# Altium PCB PCB_V3.PcbDoc
Units mil, origin at the board's own origin, x right, y up, seen from the top; angles counter-clockwise.
Board outline 1988.19 x 1771.65 mil, 2 copper layers (Top Layer, Bottom Layer); 47 components, 35 nets, 207 pads, 21 vias.
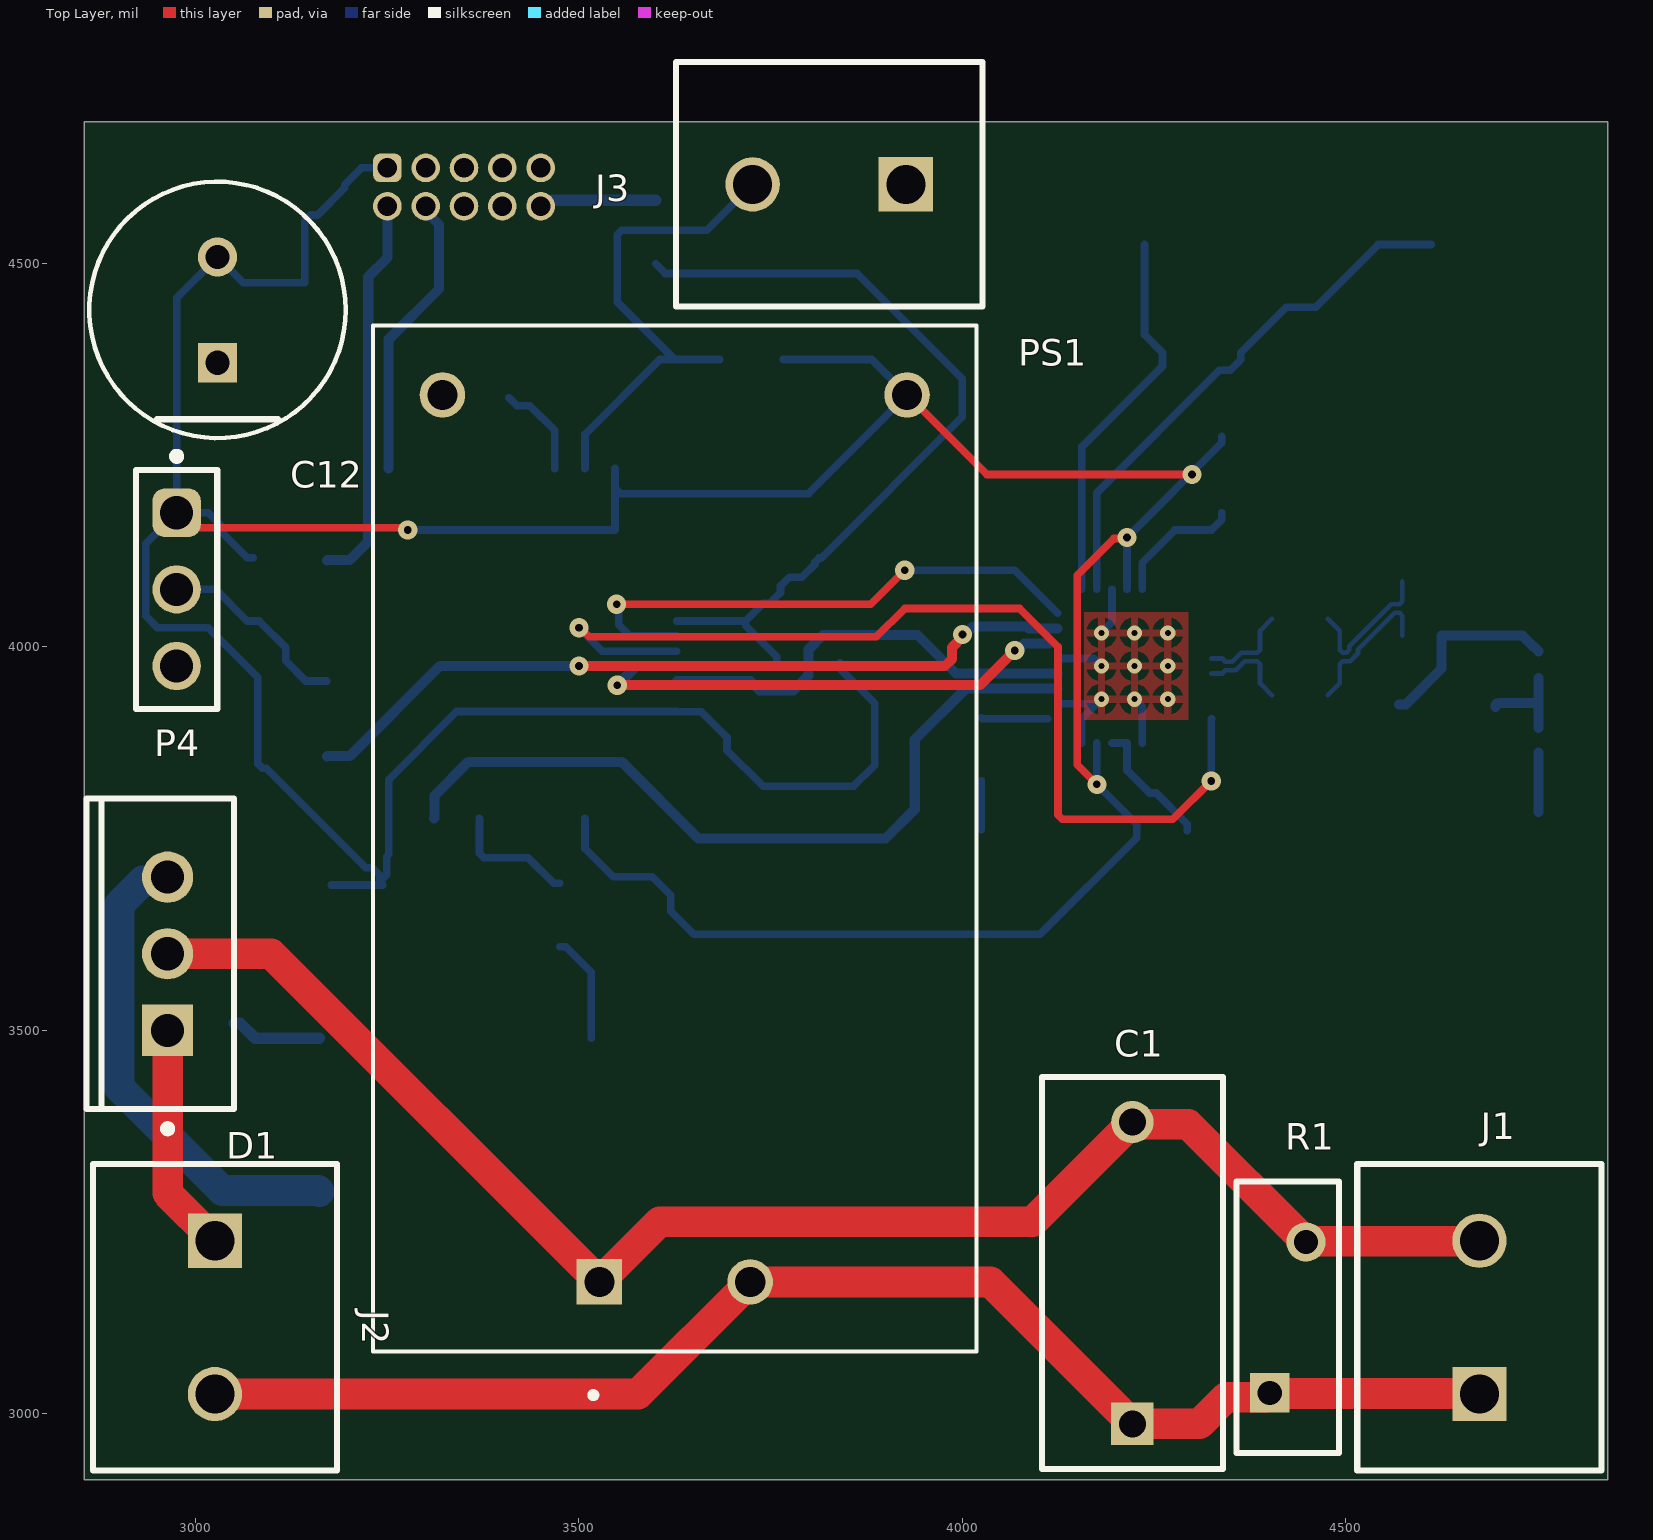
[diagram p0: Top Layer view]
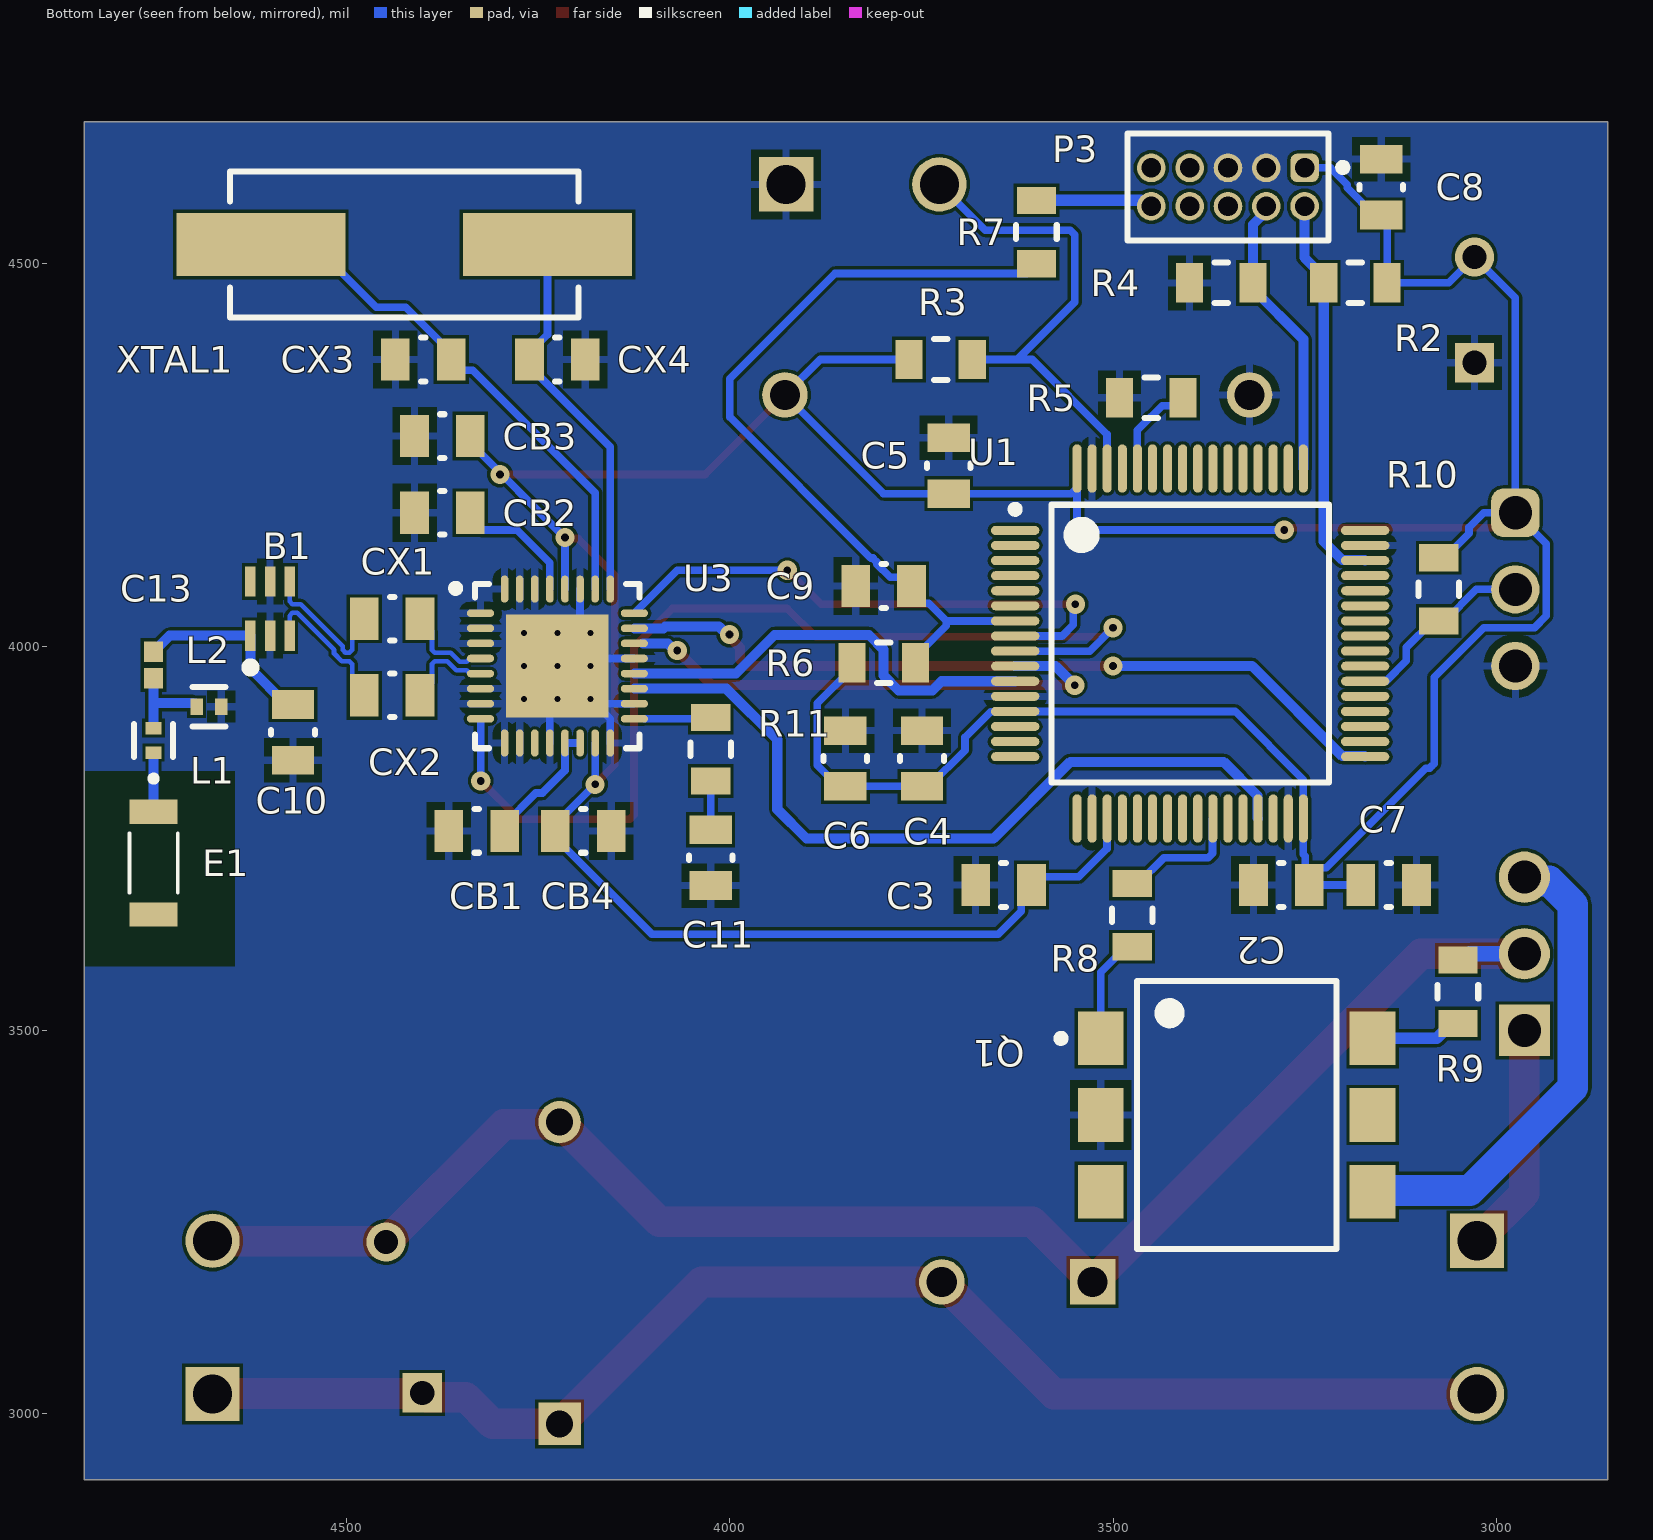
[diagram p1: Bottom Layer view, seen from below]
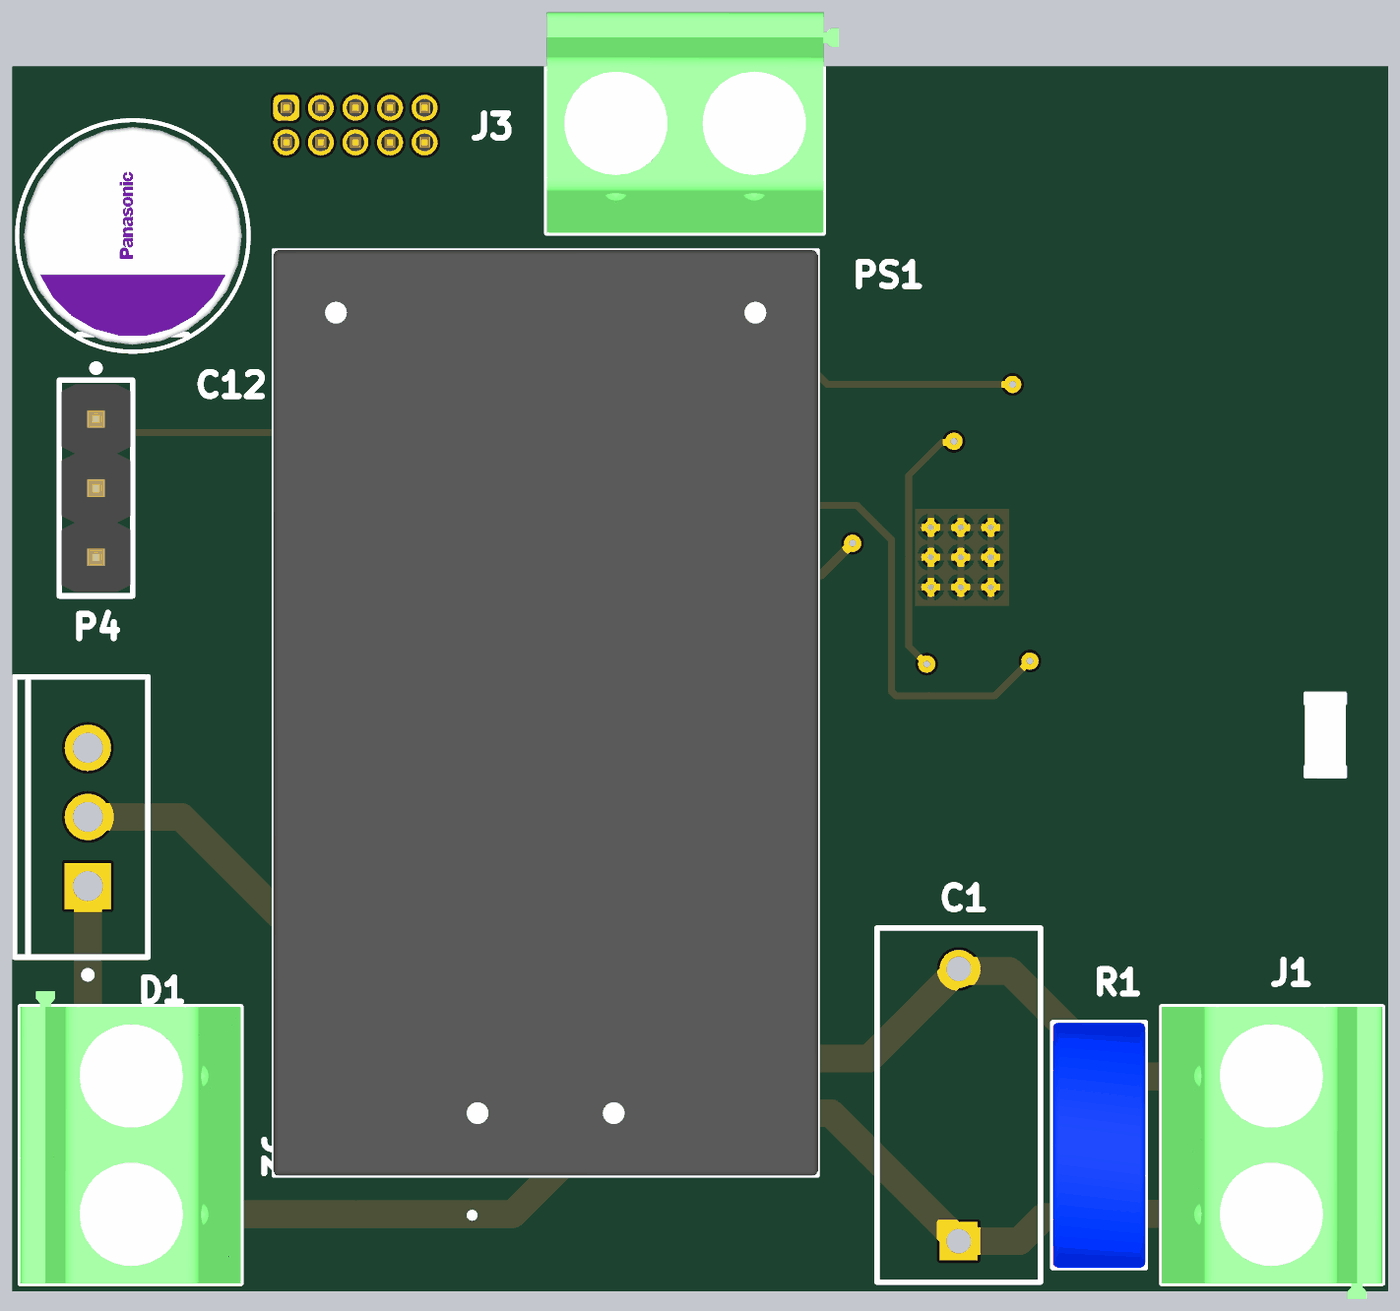
[diagram p2: 3D render of the assembled board from above, using the file's embedded part models]
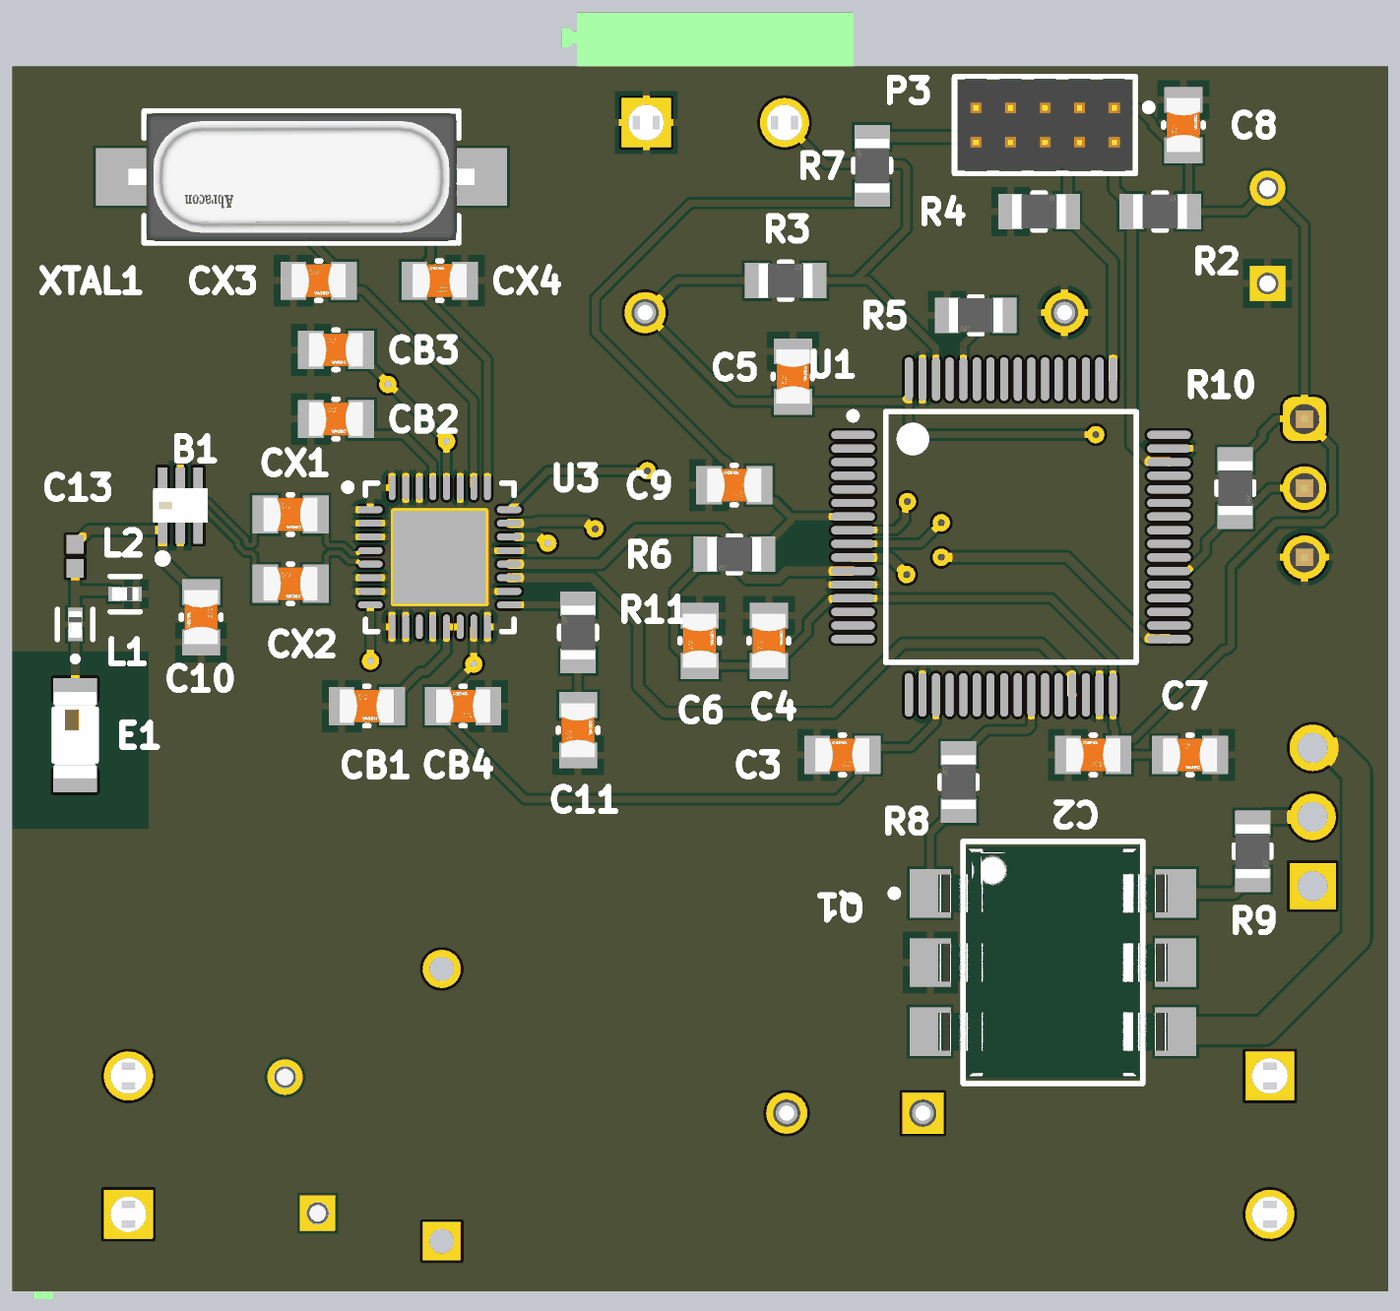
[diagram p3: 3D render of the assembled board from below, using the file's embedded part models]

## Layer stack, top to bottom
Top Solder: solder mask 0.4, Solder Resist, Dk 3.5
Top Layer: signal copper 1.4
Dielectric 1: dielectric 12.6, FR-4, Dk 4.6
Bottom Layer: signal copper 1.4
Bottom Solder: solder mask 0.4, Solder Resist, Dk 3.5

## Board outline
2854.33,2913.39 2854.33,4685.04 4842.52,4685.04 4842.52,2913.39

## Design rules (kind name [scope] priority, off if disabled: settings)
AssemblyTestPointUsage [All] p1: isadvanced=TRUE
AssemblyTestpoint [All] p1: isadvanced=TRUE testpointundercomponent=TRUE minsize=40 maxsize=100 preferedsize=60 minholesize=0 maxholesize=40 preferedholesize=32 testpointgrid=1 usegrid=TRUE gridtolerance=0.01 allowsidetop=TRUE allowsidebottom=TRUE
Clearance Clearance_1 [OnMid vs OnMid] p1: gap=4 ignorepadtopadclearanceinfootprint=FALSE except(5: Arc-Via Track-Via SMDPad-Via THPad-Via Via-Via Via-Text; 10: Arc-Hole Track-Hole SMDPad-Hole THPad-Hole Via-Hole Fill-Fill Fill-Poly Fill-Region Fill-Hole Poly-Poly Poly-Region Poly-Hole Region-Region Region-Hole Text-Hole Hole-Hole) sourcerule=53 cellrowname=All cellrowtype=0 cellcolname=All cellcoltype=0 innerlayers=TRUE
Clearance Clearance_2 [(ExistsOnLayer('Top Layer') Or ExistsOnLayer('Bottom Layer')) vs (ExistsOnLayer('Top Layer') Or ExistsOnLayer('Bottom Layer'))] p2: gap=4 ignorepadtopadclearanceinfootprint=FALSE except(5: Arc-Via Track-Via SMDPad-Via THPad-Via Via-Via Via-Text; 10: Arc-Hole Track-Hole SMDPad-Hole THPad-Hole Via-Hole Fill-Fill Fill-Poly Fill-Region Fill-Hole Poly-Poly Poly-Region Poly-Hole Region-Region Region-Hole Text-Hole Hole-Hole) sourcerule=53 cellrowname=All cellrowtype=0 cellcolname=All cellcoltype=0 outerlayers=TRUE
Clearance [All] p3: gap=10 ignorepadtopadclearanceinfootprint=FALSE ismatrix=TRUE
ComponentClearance [All] p1: isadvanced=TRUE gap=10 collisioncheckmode=3 verticalgap=10 showdistances=FALSE
DiffPairsRouting DifferentialPairsRouting_1 [InDifferentialPairClass('All Differential Pairs')] p1: maxlimit=10 minlimit=5 mostfreqgap=10 toplayer_mingap=10 toplayer_minwidth=10.76 toplayer_maxwidth=10.76 toplayer_prefwidth=10.76 bottomlayer_maxgap=5 bottomlayer_prefgap=5 bottomlayer_minwidth=6.22 bottomlayer_maxwidth=6.22 bottomlayer_prefwidth=6.22 impedanceprofiledriven=TRUE impedanceprofileid={E41AB3C2-B8D7-460C-83DE-D0F2BE12A075} impedanceprofilevalue=100.000000 maxuncoupledlength=500
DiffPairsRouting [All] p2: maxlimit=10 minlimit=10 mostfreqgap=10 toplayer_minwidth=15 toplayer_maxwidth=15 toplayer_prefwidth=15 bottomlayer_minwidth=15 bottomlayer_maxwidth=15 bottomlayer_prefwidth=15 maxuncoupledlength=500
FabricationTestPointUsage [All] p1: isadvanced=TRUE valid=0 allowmultiple=FALSE
FabricationTestpoint [All] p1: isadvanced=TRUE side=3 testpointundercomponent=TRUE minsize=40 maxsize=100 preferedsize=60 minholesize=0 maxholesize=40 preferedholesize=32 testpointgrid=1 allowsidetop=TRUE allowsidebottom=TRUE usegrid=TRUE gridtolerance=0.01
FanoutControl Fanout_BGA [IsBGA] p1: isadvanced=TRUE bgadir=Out bgaviamode=Centered fanoutstyle=Auto fanoutdirection=Alternating viagrid=1 // Fanout_BGA (Default Rule)
FanoutControl Fanout_LCC [IsLCC] p2: isadvanced=TRUE bgadir=Out bgaviamode=Centered fanoutstyle=Auto fanoutdirection=Alternating viagrid=1 // Fanout_LCC (Default Rule)
FanoutControl Fanout_SOIC [IsSOIC] p3: isadvanced=TRUE bgadir=Out bgaviamode=Centered fanoutstyle=Auto fanoutdirection=Alternating viagrid=1 // Fanout_SOIC (Default Rule)
FanoutControl Fanout_Small [(CompPinCount < 5)] p4: isadvanced=TRUE bgadir=Out bgaviamode=Centered fanoutstyle=Auto fanoutdirection=OutThenIn viagrid=1 // Fanout_Small (Default Rule)
FanoutControl Fanout_Default [All] p5: isadvanced=TRUE bgadir=Out bgaviamode=Centered fanoutstyle=Auto fanoutdirection=Alternating viagrid=1 // Fanout_Default (Default Rule)
Height [All] p1: isadvanced=TRUE minheight=0 maxheight=1000 prefheight=500
HoleSize [All] p1: isadvanced=TRUE absolutevalues=TRUE maxlimit=100 minlimit=1 maxpercent=80.000 minpercent=20.000
HoleToHoleClearance [All] p1: isadvanced=TRUE gap=10 allowstackedmicrovias=TRUE
LayerPairs [All] p1: isadvanced=TRUE enforce=TRUE
MinimumSolderMaskSliver [All] p1: isadvanced=TRUE minsoldermaskwidth=10
NetAntennae [All] p1: isadvanced=TRUE netantennaetolerance=0
PasteMaskExpansion [All] p1: isadvanced=TRUE expansion=0
PlaneClearance [All] p1: isadvanced=TRUE clearance=20
PlaneConnect [All] p1: isadvanced=TRUE planeconnectstyle=Relief reliefexpansion=20 reliefentries=4 reliefconductorwidth=10 reliefairgap=10
PolygonConnect [All] p1: connectstyle=Relief reliefconductorwidth=10 reliefentries=4 polygonreliefangle="90 Angle" airgapwidth=10
RoutingCorners [All] p1: isadvanced=TRUE cornerstyle=45-Degree minsetback=100 maxsetback=100
RoutingPriority [All] p1: isadvanced=TRUE routingpriority=0
RoutingVias RoutingViaStyle_1 [All] p1: isadvanced=TRUE holewidth=10 width=25 viastyle="Through Hole" minholewidth=10 minwidth=20 maxholewidth=30 maxwidth=40
RoutingVias [All] p2 off: holewidth=10 width=25 viastyle="Through Hole" minholewidth=10 minwidth=25 maxholewidth=10 maxwidth=25
ShortCircuit [All] p1: isadvanced=TRUE allowed=FALSE
SilkToSilkClearance [All] p1: isadvanced=TRUE silktosilkclearance=10
SilkToSolderMaskClearance [IsPad] p1: isadvanced=TRUE minsilkscreentomaskgap=10 clearancetoexposedcopper=TRUE
SolderMaskExpansion [All] p1: isadvanced=TRUE expansion=4 istentingtop=FALSE
SupplyNets "Schematic Supply Nets_4" [InNet('+3V3')] p1: isadvanced=TRUE voltage=0.000
SupplyNets "Schematic Supply Nets_2" [InNet('GND')] p2: isadvanced=TRUE voltage=0.000
SupplyNets "Schematic Supply Nets_1" [InNet('~230')] p3: isadvanced=TRUE voltage=0.000
SupplyNets "Schematic Supply Nets" [InNet('~N')] p4: isadvanced=TRUE voltage=0.000
UnRoutedNet [All] p1: isadvanced=TRUE
UnpouredPolygon [All] p1: isadvanced=TRUE
Width MaxMinWidth_3 [InNet('MISO')] p1: maxlimit=13.12 minlimit=13.12 preferedwidth=13.12 impedanceprofiledriven=TRUE impedanceprofileid={453E66AC-1D73-4F09-8EF6-78236249AB15} impedanceprofilevalue=50.000000 minimp=50.000000 maximp=50.000000 favimp=50.000000
Width MaxMinWidth_1 [InNet('SWD_CLK')] p2: maxlimit=13.12 minlimit=13.12 preferedwidth=13.12 impedanceprofiledriven=TRUE impedanceprofileid={453E66AC-1D73-4F09-8EF6-78236249AB15} impedanceprofilevalue=50.000000 minimp=50.000000 maximp=50.000000 favimp=50.000000
Width MaxMinWidth_2 [InNet('SWD_DIO')] p3: maxlimit=13.12 minlimit=13.12 preferedwidth=13.12 impedanceprofiledriven=TRUE impedanceprofileid={453E66AC-1D73-4F09-8EF6-78236249AB15} impedanceprofilevalue=50.000000 minimp=50.000000 maximp=50.000000 favimp=50.000000
Width MaxMinWidth_5 [InNet('~230')] p4: maxlimit=100 minlimit=4 preferedwidth=10 minimp=50.000000 maximp=50.000000 favimp=50.000000
Width MaxMinWidth_6 [InNet('~N')] p5: maxlimit=100 minlimit=4 preferedwidth=10 minimp=50.000000 maximp=50.000000 favimp=50.000000
Width MaxMinWidth_10 [InNet('MOSI')] p6: maxlimit=13.12 minlimit=13.12 preferedwidth=13.12 impedanceprofiledriven=TRUE impedanceprofileid={453E66AC-1D73-4F09-8EF6-78236249AB15} impedanceprofilevalue=50.000000 minimp=50.000000 maximp=50.000000 favimp=50.000000
Width MaxMinWidth_11 [InNet('SCK')] p7: maxlimit=13.12 minlimit=13.12 preferedwidth=13.12 impedanceprofiledriven=TRUE impedanceprofileid={453E66AC-1D73-4F09-8EF6-78236249AB15} impedanceprofilevalue=50.000000 minimp=50.000000 maximp=50.000000 favimp=50.000000
Width MaxMinWidth_12 [InNet('SEL')] p8: maxlimit=13.12 minlimit=13.12 preferedwidth=13.12 impedanceprofiledriven=TRUE impedanceprofileid={453E66AC-1D73-4F09-8EF6-78236249AB15} impedanceprofilevalue=50.000000 minimp=50.000000 maximp=50.000000 favimp=50.000000
Width MaxMinWidth_4 [InNet('NetD1_1')] p9: maxlimit=100 minlimit=4 preferedwidth=10 minimp=50.000000 maximp=50.000000 favimp=50.000000
Width MaxMinWidth_7 [InNet('NetD1_3')] p10: maxlimit=100 minlimit=4 preferedwidth=10 minimp=50.000000 maximp=50.000000 favimp=50.000000
Width MaxMinWidth_16 [InxNet('RF_ANT')] p11: maxlimit=13.12 minlimit=13.12 preferedwidth=13.12 impedanceprofiledriven=TRUE impedanceprofileid={453E66AC-1D73-4F09-8EF6-78236249AB15} impedanceprofilevalue=50.000000 minimp=50.000000 maximp=50.000000 favimp=50.000000
Width [All] p12: maxlimit=20 minlimit=4 preferedwidth=10 minimp=50.000000 maximp=50.000000 favimp=50.000000
3 further rules are at their usual default settings.

## Classes and differential pairs
differential pair D_RF_C: +RF_C_P -RF_C_N
differential pair D_RF: +RF_P -RF_N

## Components (designator, comment, footprint, x,y, rotation, side; value= is the part's Value field where it differs from the comment)
B1 "2.45GHz Balun" WE-BAL_0805 4600,4050 r0 bottom
C1 "100nF 400V" TDK-B32921C3104M 4222.09,3182.97 r90 top
C2 "10uF" FP-CC0805-0_85-MFG 3280.29,3689.21 r0 bottom value="100 nF"
C3 "100nF" FP-CC0805-0_85-MFG 3642.89,3689.21 r0 bottom value="100 nF"
C4 "100nF" FP-CC0805-0_85-MFG 3749.29,3854.33 r90 bottom value="100 nF"
C5 "100nF" FP-CC0805-0_85-MFG 3714.41,4236.42 r90 bottom value="100 nF"
C6 "100nF" FP-CC0805-0_85-MFG 3849.29,3854.33 r90 bottom value="100 nF"
C7 "1uF" FP-CC0805-0_85-MFG 3140.44,3689.21 r180 bottom value="100 nF"
C8 "100nF" FP-CC0805-0_85-MFG 3150,4600 r90 bottom value="100 nF"
C9 "100nF" FP-CC0805-0_85-MFG 3799.29,4079.33 r0 bottom value="100 nF"
C10 "?" FP-CC0805-0_85-MFG 4569.93,3888.43 r270 bottom value="100 nF"
C11 "2.2pF" FP-CC0805-0_85-MFG 4025,3725 r90 bottom value="100 nF"
C12 "220uF 16v" FP-OS-CON-TH-E13-d_0_6-MFG 3028.3,4439.72 r90 top
C13 "1,2pF" CAPC1005X56X25NL10T15 4751.97,3976.38 r270 bottom
CB1 "100nF" FP-CC0805-0_85-MFG 4330.35,3759.88 r180 bottom value="100 nF"
CB2 "100nF" FP-CC0805-0_85-MFG 4375,4175 r180 bottom value="100 nF"
CB3 "1uF" FP-CC0805-0_85-MFG 4375,4275 r180 bottom value="100 nF"
CB4 "1uF" FP-CC0805-0_85-MFG 4191.2,3759.88 r0 bottom value="100 nF"
CX1 "22pF" FP-CC0805-0_85-MFG 4440.71,4036.75 r180 bottom value="100 nF"
CX2 "22pF" FP-CC0805-0_85-MFG 4440.71,3936.75 r180 bottom value="100 nF"
CX3 "12pF" FP-CC0805-0_85-MFG 4400,4375 r180 bottom value="100 nF"
CX4 "12pF" FP-CC0805-0_85-MFG 4225,4375 r0 bottom value="100 nF"
D1 "BTA16" ONSC-TO-220-3-221A-09 2963.18,3599.56 r180 top
E1 "2450AT18B100E" XDCR_2450AT18B100E 4751.97,3717.85 r270 bottom
J1 "1729128" PHOE-1729128-2_V 4675,3125 r90 top
J2 "1729128" PHOE-1729128-2_V 3025,3125 r270 top
J3 "1729128" PHOE-1729128-2_V 3826.55,4603.5 r180 top
L1 "3,3nH" FP-L-07-MFG 4751.97,3877.95 r270 bottom
L2 "2,7nH" FP-L-07-MFG 4679.63,3921.89 r0 bottom
P3 "62201021121" 62201021121 3350,4600 r0 bottom
P4 "61300311121" 61300311121 2975,4075 r270 top
PS1 "HLK-PM03" CONV_HLK-PM03 3625,3750 r90 top
Q1 "MOC3021SR2VM" FP-646BY-MFG 3338.58,3389.14 r180 bottom
R1 "07D431K" FP-B72207S0110K101-MFG 4425,3125 r90 top value=2750pF
R2 "10k Ohm" FP-RMCF0805-MFG 3183.66,4475 r180 bottom
R3 "10k Ohm" FP-RMCF0805-MFG 3725,4375 r180 bottom
R4 "10k Ohm" FP-RMCF0805-MFG 3358.66,4475 r180 bottom
R5 "10k Ohm" FP-RMCF0805-MFG 3450,4325 r0 bottom
R6 "10k Ohm" FP-RMCF0805-MFG 3799.29,3979.33 r0 bottom
R7 "1k Ohm" FP-RMCF0805-MFG 3600,4541.34 r90 bottom
R8 "1k Ohm" FP-RMCF0805-MFG 3475,3650 r90 bottom
R9 "1k Ohm" FP-RMCF0805-MFG 3050,3550 r270 bottom
R10 "10k Ohm" FP-RMCF0805-MFG 3075,4075 r270 bottom
R11 "0 Ohm" FP-RMCF0805-MFG 4025,3866.34 r90 bottom
U1 "STM32L053R8T6D" STM-LQFP64_L 3399.29,4004.33 r180 bottom
U3 "AT86RF233-ZU" 32QN2_M 4225,3975 r180 bottom
XTAL1 "16MHz" FP-ABLS-MFG 4425,4525 r0 bottom

## Footprints (in the part's own frame and the unit in brackets; to place one, negate y for a bottom-side part, rotate by r counter-clockwise, add the part's x,y. Pads: shape width x height; smd on the part's side, far side on the other; paste and mask are expansions set on the pad)
32QN2_M [mm] "QFN, 32-Leads, Body 5x5mm, Pitch 0.5mm, Thermal Pad 3.4x3.4mm, IPC Low Density"
  oval 0.9x0.25 smd: 1(-2.55,1.75) 2(-2.55,1.25) 3(-2.55,0.75) 4(-2.55,0.25) 5(-2.55,-0.25) 6(-2.55,-0.75) 7(-2.55,-1.25) 8(-2.55,-1.75) 17(2.55,-1.75) 18(2.55,-1.25) 19(2.55,-0.75) 20(2.55,-0.25) 21(2.55,0.25) 22(2.55,0.75) 23(2.55,1.25) 24(2.55,1.75)
  oval 0.25x0.9 smd: 9(-1.75,-2.55) 10(-1.25,-2.55) 11(-0.75,-2.55) 12(-0.25,-2.55) 13(0.25,-2.55) 14(0.75,-2.55) 15(1.25,-2.55) 16(1.75,-2.55) 25(1.75,2.55) 26(1.25,2.55) 27(0.75,2.55) 28(0.25,2.55) 29(-0.25,2.55) 30(-0.75,2.55) 31(-1.25,2.55) 32(-1.75,2.55)
  rect 3.4x3.4 smd: 33(0,0)
  silkscreen extent -3.5,-2.73 2.73,2.73, body extent -2.58,-2.58 2.58,2.58, height 1
61300311121 [mm] "Pin Header, pitch 2.54 mm, THT, Vertical, single row, 3p"
  rrect50% 1.6x1.6 hole 1.1: 1(-2.54,0)
  round 1.6 hole 1.1: 2(0,0) 3(2.54,0)
  silkscreen extent -4.53,-1.34 3.96,1.34, body extent -3.81,-1.27 3.81,1.27, height 8.57
62201021121 [mm] "Pin Header, pitch 1.27 mm, THT, Vertical, dual row, 10p"
  rrect50% 0.95x0.95 hole 0.65: 1(-2.54,-0.635)
  round 0.95 hole 0.65: 2(-2.54,0.635) 3(-1.27,-0.635) 4(-1.27,0.635) 5(0,-0.635) 6(0,0.635) 7(1.27,-0.635) 8(1.27,0.635) 9(2.54,-0.635) 10(2.54,0.635)
  silkscreen extent -3.93,-1.78 3.33,1.78, body extent -3.17,-1.7 3.18,1.7, height 5.33
CAPC1005X56X25NL10T15 [mm] "Chip Capacitor, 2-Leads, Body 1.00x0.50mm, IPC Medium Density"
  rect 0.68x0.64 smd: 1(-0.44,0) 2(0.44,0)
  body extent -0.55,-0.3 0.55,0.3, height 0.56
CONV_HLK-PM03 [mm]
  rect 1.508x1.508 / inner round 1.508 / far side rect 1.508x1.508 hole 1: 1(-14.7,2.5)
  round 1.508 hole 1: 2(-14.7,-2.5) 3(14.7,7.7) 4(14.7,-7.7)
  silkscreen extent -18.55,-10 17,10, body extent -17,-10 17,10, height 15
FP-646BY-MFG [mm]
  rect 1.52x1.78 smd paste+0 mask+0: 1(-4.505,2.54) 2(-4.505,0) 3(-4.505,-2.54) 4(4.505,-2.54) 5(4.505,0) 6(4.505,2.54)
  silkscreen extent -5.95,-4.45 3.3,4.45, body extent -4.58,-4.26 4.58,4.26, height 4.95
FP-ABLS-MFG [mm]
  rect 5.6x2.1 smd paste+0 mask+0: 1(-4.75,0) 2(4.75,0)
  silkscreen extent -5.77,-2.42 5.77,2.42, body extent -6.35,-2.35 6.35,2.35, height 4.3
FP-B72207S0110K101-MFG [mm]
  rect 1.3x1.3 hole 0.8 paste-2539.97 mask+0: 1(-2.5,0.6)
  round 1.3 hole 0.8 paste-2539.97 mask+0: 2(2.5,-0.6)
  silkscreen extent -4.5,-1.7 4.5,1.7, body extent -4.6,-1.8 4.6,1.8, height 0.25
FP-CC0805-0_85-MFG [mm]
  rect 0.95x1.4 smd paste+0 mask+0: 1(-0.925,0) 2(0.925,0)
  silkscreen extent -0.07,-0.73 0.08,0.72, body extent -1,-0.63 1,0.63, height 0.95
FP-L-07-MFG [mm]
  rect 0.41x0.535 smd paste+0 mask+0: 1(-0.408,0) 2(0.408,0)
  silkscreen extent -0.55,-0.65 0.55,0.65, body extent -0.5,-0.25 0.5,0.25, height 0.6
FP-OS-CON-TH-E13-d_0_6-MFG [mm]
  rect 1.3x1.3 hole 0.8 paste-2539.97 mask+0: 1(-1.75,0)
  round 1.3 hole 0.8 paste-2539.97 mask+0: 2(1.75,0)
  silkscreen extent -4.25,-4.25 4.25,4.25, body extent -4.35,-4.35 4.35,4.35, height 0.25
FP-RMCF0805-MFG [mm]
  rect 0.9x1.3 smd paste+0 mask+0: 1(-1.05,0) 2(1.05,0)
  silkscreen extent -0.22,-0.67 0.22,0.68, body extent -1,-0.63 1,0.63, height 0.65
ONSC-TO-220-3-221A-09 [mm] "FM, 3-Leads, Body 10.3x4.85mm, Pitch 2.54mm"
  rect 1.7x1.7 hole 1.1: 1(0,2.54)
  round 1.7 hole 1.1: 2(0,0) 3(0,-2.54)
  silkscreen extent -2.2,-5.15 2.7,5.92, body extent -2.18,-5.15 2.67,5.15, height 19.85
PHOE-1729128-2_V [mm] "Receptacle, 2-Leads, Body 8.1x10.16mm, Pitch 5.08mm"
  rect 1.8x1.8 hole 1.3: 1(-2.54,0)
  round 1.8 hole 1.3: 2(2.54,0)
  silkscreen extent -5.08,-4.05 5.08,4.05, body extent -5.65,-4.05 5.08,4.05, height 10.01
STM-LQFP64_L [mm] "QFP, 64-Leads, Body 10x10mm, Pitch 0.5mm, IPC High Density"
  oval 1.6x0.3 smd: 1(-5.8,3.75) 2(-5.8,3.25) 3(-5.8,2.75) 4(-5.8,2.25) 5(-5.8,1.75) 6(-5.8,1.25) 7(-5.8,0.75) 8(-5.8,0.25) 9(-5.8,-0.25) 10(-5.8,-0.75) 11(-5.8,-1.25) 12(-5.8,-1.75) 13(-5.8,-2.25) 14(-5.8,-2.75) 15(-5.8,-3.25) 16(-5.8,-3.75) 33(5.8,-3.75) 34(5.8,-3.25) 35(5.8,-2.75) 36(5.8,-2.25) 37(5.8,-1.75) 38(5.8,-1.25) 39(5.8,-0.75) 40(5.8,-0.25) 41(5.8,0.25) 42(5.8,0.75) 43(5.8,1.25) 44(5.8,1.75) 45(5.8,2.25) 46(5.8,2.75) 47(5.8,3.25) 48(5.8,3.75)
  oval 0.3x1.6 smd: 17(-3.75,-5.8) 18(-3.25,-5.8) 19(-2.75,-5.8) 20(-2.25,-5.8) 21(-1.75,-5.8) 22(-1.25,-5.8) 23(-0.75,-5.8) 24(-0.25,-5.8) 25(0.25,-5.8) 26(0.75,-5.8) 27(1.25,-5.8) 28(1.75,-5.8) 29(2.25,-5.8) 30(2.75,-5.8) 31(3.25,-5.8) 32(3.75,-5.8) 49(3.75,5.8) 50(3.25,5.8) 51(2.75,5.8) 52(2.25,5.8) 53(1.75,5.8) 54(1.25,5.8) 55(0.75,5.8) 56(0.25,5.8) 57(-0.25,5.8) 58(-0.75,5.8) 59(-1.25,5.8) 60(-1.75,5.8) 61(-2.25,5.8) 62(-2.75,5.8) 63(-3.25,5.8) 64(-3.75,5.8)
  silkscreen extent -5.93,-4.6 4.6,4.6, body extent -5,-5 5,5, height 1.6
TDK-B32921C3104M [mm] "THD, 2-leads, Body 13x6mm, Pitch 10mm"
  rect 1.4x1.4 hole 0.9: 1(-5,0)
  round 1.4 hole 0.9: 2(5,0)
  silkscreen extent -6.5,-3 6.5,3, body extent -6.5,-3 6.5,3, height 12
WE-BAL_0805 [mm] "Multilayer Chip Balun, body 2x1.25mm"
  rect 0.35x1 smd: 1(0.65,0.9) 2(0,0.9) 3(-0.65,0.9) 4(-0.65,-0.9) 5(0,-0.9) 6(0.65,-0.9)
  silkscreen extent 0.5,1.8 0.8,2.1, body extent -1,-0.63 1,0.62, height 0.87
XDCR_2450AT18B100E [mm]
  rect 0.8x1.6 smd: 1(-1.7,0) 2(1.7,0)
  silkscreen extent -2.9,-0.8 0.98,0.8, body extent -1.6,-0.8 1.6,0.8, height 0.7

## Part data
B1: library part CMP-03913-19122360-1, "748421245 100O Surface Mount Chip Balun", Case Code (Imperial)=0805, Case Code (Metric)=2012, Frequency=2.5GHz, Max Operating Temperature=85°C, Min Operating Temperature=-40°C, Case/Package=0805, Depth=850µm, Height=850µm, Impedance=100Ω, Insertion Loss (dB)=0.54dB, Lead Free="Lead Free", Length=2mm, Max Frequency=2.5GHz, Max Switching Frequency=2.5GHz, Mount="Surface Mount", NexarPartId=19122360, Number of Pins=6, Packaging="Cut Tape (CT)", REACH SVHC=Unknown, RoHS=Compliant, Termination=SMD/SMT, Width=1.25mm
C1: library part CMP-2000-05890-1, "EMI Suppression Capacitor (MKP), 0.1 uF, +/- 20%, 305 V, 2-Pin THD, RoHS, Bulk", Capacitance=0.1µF, Dielectric Material=Polypropylene(PP), ESR (Equivalent Series Resistance)=-, Manufacturer=TDK, Operating Temperature=-40°C~110°C, Package / Case=Radial, Package Description="2-Pin Through Hole Device, Body 13 x 6 mm, Pitch 10 mm", Package Reference=B32921C3104M, Standard Package=1,000, Tolerance=±20%, Voltage Rating - AC=305V, Applications=EMI,RFISuppression, Catalog Drawings=Y(1,2),X(1,2)SeriesSide1Y(1,2),X(1,2)SeriesSide2, Category=Capacitors, Datasheet URL=https://en.tdk.eu/inf/20/20/db/fc_2009/X2_B32921_928.pdf, Datasheet Version=09/2016, Family=FilmCapacitors, Featured Product=FilmCapacitors, Features=X2SafetyRated, Height - Seated (Max)="0.472\"(12.00mm)", Lead Spacing="0.394\"(10.00mm)", Manufacturer URL=http://www.tdk.com/, Mounting Technology=ThroughHole, Mounting Type=ThroughHole, Online Catalog=B32921C/D-B32928C/DSeries, Other Names=495-2318B32921C3104M000B32921C3104MN1, Packaging=Bulk, PCN Design/Specification=B32(5679)B333Series02/May/2014, PCN Packaging=MKT,MKPTypeLaserMarking26/Apr/2013, Product Training Modules=FilmCapacitorsCapacitorsforLEDApplicationsAutomotiveIndustryCapacitors, Series=B32921, Size / Dimension="0.512\"Lx0.236\"W(13.00mmx6.00mm)", Termination=PCPins, Voltage Rating - DC=-
C2 C3 C4 C5 C6 C7 C8 C9 C10 C11 CB1 CB2 CB3 CB4 CX1 CX2 CX3 CX4: library part CMP-2100-03606-3, "CAP CER 0.1UF 50V X7R 0805", Capacitance="100 nF", Manufacturer=Yageo, Manufacturer Part Number=CC0805KRX7R9BB104, Package=CC0805-0.85, Temperature="-30°C to +85°C", Temperature Characteristic=X7R, Temperature Range High=+85°C, Temperature Range Low=-30°C, Tolerance=0.1, Voltage Rating="50 V", Automotive=No, Category=Cap, ComponentLink2Description=Datasheet, ComponentLink2URL=http://www.yageo.com/documents/recent/UPY-GPHC_Y5V_6.3V-to-50V_8.pdf, Device Class L1="Passive Components", Device Class L2=Capacitors, Device Class L3="Ceramic Capacitors", Digikey Description="CAP CER 0.1UF 50V X7R 0805", Footprint Url=http://www.yageo.com/exep/pages/download/literatures/UPY-C_GEN_24.pdf, Height=0.95mm, Ipc Land Pattern Name=CAPC200125X85, Lead Free=Yes, Material=Ceramic, Mouser Description="Multilayer Ceramic Capacitors MLCC - SMD/SMT 100nF 50V X7R 10%", Octopart=https://octopart.com/cc0805krx7r9bb104-yageo-192993, RoHS=TRUE
C12: library part CMP-05428-000279-1, "Conductive Polymer Aluminum Solid Capacitors (OS-CON) 560uF ±20% 16V RADIAL TH 8x13mm", Capacitance=560uF, Case/Package=Radial, ESR (Equivalent Series Resistance)=8mR, Max Operating Temperature=105°C, Min Operating Temperature=-55°C, Tolerance=20%, Voltage Rating=16V, Mount="Through Hole", Packaging=Bulk, RoHS Compliant=Yes, Series="OS-CON™, SEPG"
C13: library part CMP-2008-02540-1, Manufacturer="AVX Interconnect / Elco", Part Number=04023C561KAT2A
D1: library part CMP-1070-00099-1, "Sensitive Gate Triacs, Silicon Bidirectional Thyristor, 3-Pin TO-220, Pb-Free, Bulk Box", Manufacturer="On Semiconductor", PartNumber=MAC228A6G, ComponentLink1Description="Manufacturer URL", ComponentLink1URL=http://www.onsemi.com/, ComponentLink2Description=Datasheet, ComponentLink2URL=http://www.onsemi.com/pub_link/Collateral/MAC228A-D.PDF, ComponentLink3Description="Package Specification", ComponentLink3URL=http://www.onsemi.com/pub_link/Collateral/221A-09.PDF, DatasheetVersion="Rev. 7", IT(RMS) Max (A)=8, ITSM Max (A)=80, Mounting Technology="Through Hole", PackageDescription="3-Pin Flange Mount, Vertical Straight Lead, Body 9.97 x 4.445 mm, Pitch 2.54 mm", PackageReference=TO-220-3-221A-09, PackageVersion="Rev. AG, 09/2011", Packing="Bulk Box", RoHS=Pb-Free
E1: "2.4GHz - Chip RF Antenna 2.4GHz ~ 2.5GHz 0.5dBi Solder Surface Mount", Package=None, Availability="In Stock", Check_prices=https://www.snapeda.com/parts/2450AT18B100E/Johanson+Technology+Inc./view-part/?ref=eda, MF="Johanson Technology", MP=2450AT18B100E, Price=None, Purchase-URL=https://pricing.snapeda.com/search/part/2450AT18B100E/?ref=eda, SnapEDA_Link=https://www.snapeda.com/parts/2450AT18B100E/Johanson+Technology+Inc./view-part/?ref=snap
J1 J2 J3: library part CMP-2000-05815-1, "PCB Terminal Block, 13.5 A, 400 V, 2-Pin THD, RoHS, Bulk", Current Rating=13500mA, Manufacturer="Phoenix Contact", Package Description="2-Pin Through Hole Device, Body 8.1 x 10.16 mm, Pitch 5.08 mm", Package Reference=1729128-2, Package Version=03/2015, Voltage Rating=400V, Datasheet URL=https://datasheet.ciiva.com/16046/1729128-16046181.pdf, Datasheet Version=12/2013, Manufacturer URL=http://www.phoenixcontact.com/, Mounting Technology=ThroughHole, No. of Positions=2, No. of Rows=1, Orientation=Horizontal, Package URL=https://www.phoenixcontact.com/online/portal/pi/pxc/product_detail_page/!ut/p/b1/3VdJjqNKFDxLH8AFycySyWY2ozFsEPOMMQaDOX1XedGL_1Vdm5YXJleknhSKeBkvI6EA8ncAo3AYoDhBQGco6KN7VURTdemj9us_IEKEZo_YHiPAEWEFmDGOHMORkqKYCORBZxgL7ZoaZYcbFFUZ3fqxSY6GOuxydWUuHqz1ynmMFygu583Bob0Ewr6Sd_l-5m-kAueHiB0jpRwZwe58wwtkpxtMYd_LmGcDRU02dRNEyWt6Y2ti5pSyJ_reIkzIulrqApdnbT11V5jnCKbYNCvhEM1MCpPByat_X379-iThf08CI5GfOPqfBeS3BRoBOdD55AKVv0iLwCMq-2BrzXWSGRH7pUGD9uwXQjiph3xL0DKQwdGa0JImiIOmBNOestqgwTHSSs2oOep-78apyXQBvNi8ZLaFjvjWvcaUEBu0MC6Wbe-d6mB0FAebo2lUWinqYaZs5DAYzV0RP9yitUjnGJ0iI9xhZkT42OCQNUJJhkgWINNQLP2JFP6OpMg3JCVg70jqHT0lvKOnhHf0lPuOnnLf0VPuWx6_dxwUIvwk5WMkT0kLL1mh61l2yZVSzG3pYV_bqo-mj6uMKwKwdnnW8Jh5RTOJzMOA5c-eJDaZQw4mTMPH02PvS_ZAqNVjVTo2WyYLkwH_KU1mmmG5kjRhDqPXLwwVHvVOjCM60-fpXvTDfMGW1PVFVS1r4e4yVDk4ZdNbkUHvqPqQSeian4UD39fNKmachqdJ1NJbyk8rXT9mXTvPk3oE5meulKGgiruPJek-4I9hTT6G8ZLOyRSm2RRVbThERQad5OS28hdt4YW4vG0stgYYzsWsK4_7y6DZMjJSCqri1kyiZR5vD7pwIrNR7QwPHTcLTI5qT7eRlpHrdGiupYlqQDJ7zy_CND8fWWBoLRXxk1RVcXiBQwbTD4Xi7KL-FuO94t9xaqweXzH, Packing=Bulk, PartNumber=1729128, Pitch=5.08mm, RoHS=TRUE
L1 L2: library part CMP-56493-000002-1, "FIXED IND 3.3NH 300MA 190MOHM SM", Case Code (Imperial)=0402, Case Code (Metric)=1005, Current Rating=300mA, DC Resistance (DCR)=190mR, Inductance=3.3nH, Max Operating Temperature=100°C, Min Operating Temperature=-40°C, Package Quantity=10000, Self Resonant Frequency=21GHz, Test Frequency=100MHz, Case/Package=0402, Core Material=Ceramic, DC Current=300mA, Depth=0.6mm, Height=0.5mm, Height - Seated (Max)=0.024inch, Length=1mm, Max DC Current=300mA, Military Standard=Not, Mount="Surface Mount", Number of Pins=2, Packaging="Cut Tape", Q Factor=8, Radiation Hardening=No, REACH SVHC="No SVHC", RoHS Compliant=Yes, Series=L-07, Shielding=Unshielded, Termination=SMD/SMT, Weight=2.3E-05oz, Width=0.5mm
P3: library part CMP-1502-00948-3, Color=Black, Contact Resistance=20mΩ, Current Rating=1A, Max Operating Temperature=105°C, Min Operating Temperature=-40°C, Operating Supply Voltage=100V, Connector Type="Male Pin", Contact Material=Copper, Contact Mating Length=3.81mm, Contact Plating=Gold, Gender=Male, Height=5.65mm, Lead Pitch=1.27mm, Mount="Through Hole", NexarPartId=32855586, Number of Contacts=10, Number of Pins=10, Number of Positions=10, Number of Rows=2, Orientation=Vertical, Packaging=Box, Pitch=1.27mm, REACH SVHC=Unknown, RoHS=Compliant, Row Spacing=1.27mm, Termination=Solder, Voltage Rating=100V
P4: library part CMP-1502-01062-3, Color=Black, Contact Resistance=20mΩ, Current Rating=3A, Max Operating Temperature=105°C, Min Operating Temperature=-40°C, Operating Supply Voltage=250V, Connector Type="Male Pin", Contact Material=Copper, Contact Mating Length=5.9944mm, Contact Plating=Gold, Gender=Male, Height=8.94mm, Lead Free="Lead Free", Lead Pitch=2.54mm, Mount="Through Hole", NexarPartId=32855521, Number of Contacts=3, Number of Pins=3, Number of Positions=3, Number of Rows=1, Orientation=Vertical, Packaging=Bulk, Pitch=2.54mm, REACH SVHC=Unknown, RoHS=Compliant, Termination=Solder, Voltage Rating=250V
PS1: Package=None, Check_prices=https://www.snapeda.com/parts/HLK-PM03/Hi-link/view-part/?ref=eda, MF=Hi-link, MP=HLK-PM03, SnapEDA_Link=https://www.snapeda.com/parts/HLK-PM03/Hi-link/view-part/?ref=snap
Q1: library part CMP-00278-84330366-1, "MOC3021SR2VM Triac Driver Output Optocoupler, 6-Pin DIP 400V Random Phase", Case/Package=SMD/SMT, Forward Current=60mA, Forward Voltage=1.15V, Hold Current=100µA, Isolation Voltage=7.5kV, Manufacturer Lifecycle Status=ACTIVE, Max Input Voltage=1.5V, Max Operating Temperature=85°C, Max Power Dissipation=330mW, Min Operating Temperature=-40°C, Output Voltage=400V, Reverse Breakdown Voltage=3V, Approvals="EN, IEC, UL", Input Current=60mA, Lead Free="Lead Free", Lifecycle Status=Production, Mount="Surface Mount", NexarPartId=84330366, Nominal Input Voltage=1.15V, Number of Channels=1, Number of Circuits=1, Number of Elements=1, Number of Pins=6, Packaging=Digi-Reel®, Power Dissipation=330mW, Radiation Hardening=No, REACH SVHC="No SVHC", RoHS=Compliant, Schedule B="8541408000, 8541408000", Weight=810mg
R1: library part CMP-10618-000012-1, "VARISTOR 18V 250A DISC 7MM", Capacitance=2750pF, Clamping Current=2.5A, Clamping Voltage=36V, Manufacturer=EPCOS, Manufacturer Part Number=B72207S0110K101, Temperature="-40°C to +105°C", Temperature Range High=+105°C, Temperature Range Low=-40°C, Varistor Voltage=18V, Voltage Rating Ac=11V, Voltage Rating Dc=14V, Voltage Tolerance=10%, Automotive=No, Category=Res, ComponentLink2Description=Datasheet, ComponentLink2URL=https://product.tdk.com/info/en/documents/data_sheet/70/db/var/SIOV_Leaded_StandarD.pdf, Device Class L1="Circuit Protection", Device Class L2=Varistors, Device Class L3=unset, Digikey Description="VARISTOR 18V 250A DISC 7MM", Height=11mm, Lead Free=Yes, Mouser Description="Varistor: metal-oxide; THT; 11VAC; 14VDC; 18V; 250A; 800mJ", Octopart=https://octopart.com/b72207s0110k101-epcos-11931358, Package=B72207S0110K101, RoHS=TRUE
R2 R3 R4 R5 R6 R7 R8 R9 R10 R11: library part CMP-26527-000017-1, "RES 0 OHM JUMPER 1/8W 0805", Case Code (Imperial)=0805, Case Code (Metric)=2012, Max Operating Temperature=155°C, Max Power Dissipation=125mW, Min Operating Temperature=-55°C, Resistance=0mR, Case/Package=0805, Composition="Thick Film", Contact Plating=Tin, Depth=1.25mm, Features="Automotive AEC-Q200", Height=0.026inch, Lead Free="Lead Free", Length=2mm, Military Standard=Not, Mount="Surface Mount", Number of Terminations=2, Packaging="Tape and Reel", Power Rating=125mW, Radiation Hardening=No, Width=0.049inch
U1: library part CMP-1546-00063-2, "Ultra-low-power 32-Bit MCU ARM-based Cortex-M0+, 64 KB Flash, 8 KB RAM, 51 I/Os, 64-Pin LQFP, -40 to 85 degC, Tray", I/Os (High Current)=51, Operating Frequency(F) (Processor speed) (MHz)=32, Package Description="64-Pin Low-profile Quad Flat Package, Body 10 x 10 mm, Pitch 0.5 mm", Package Reference=LQFP64, Supply Voltage(Vcc) min (V)=1.65, ComponentLink1Description="Manufacturer URL", ComponentLink1URL=http://www.st.com/, ComponentLink2Description=Datasheet, ComponentLink2URL=http://www.st.com/st-web-ui/static/active/en/resource/technical/document/datasheet/DM00105960.pdf, Core="ARM Cortex-M0+", D/A Converter=1, Data E2PROM nom (B)=2048, DatasheetVersion="Rev. 5", FLASH Size (Prog) (kB)=64, Internal RAM Size (kB)=8, Mounting Technology="Surface Mount", Packing=Tray
U3: library part CMP-0295-00009-1, "Low Power, 2.4GHz Transceiver for ZigBee, RF4CE, IEEE 802.15.4, 6LoWPAN, and ISM Application, 1.8 to 3.6 V, -40 to 85 degC, 32-Pin VQFN (QN2), RoHS, Tray", Frequency Band="2445 MHz Typ.", Manufacturer=Atmel, Power Output="4 dBm Typ.", Temperature Range="-40 to 85 degC", Voltage Range="1.8 to 3.6 V", ComponentLink1Description="Manufacturer URL", ComponentLink1URL=www.atmel.com/, ComponentLink2Description=Datasheet, ComponentLink2URL=http://www.atmel.com/Images/Atmel-8351-MCU_Wireless-AT86RF233_Datasheet.pdf, ComponentLink3Description="Package Specification", ComponentLink3URL=http://www.atmel.com/Images/Atmel-8351-MCU_Wireless-AT86RF233_Datasheet.pdf, Data Rate="2 Mb/s Max.", DatasheetVersion="Rev. 8315E", Mounting Technology="Surface Mount", PackageDescription="32-Pin Quad Flat Non-Leaded Package, Body 5 x 5 mm, Pitch 0.5 mm", PackageVersion="Rev. A", Packing=Tray, PartNumber=AT86RF233-ZU, RoHS=TRUE
XTAL1: library part CMP-27762-000003-1, "CRYSTAL 16.0000MHZ 18PF SMD", Load Capacitance=18pF, Manufacturer=Abracon, Manufacturer Part Number=ABLS-16.000MHZ-K4T, Package=ABLS, Temperature="-40°C to +125°C", Temperature Range High=+125°C, Temperature Range Low=-40°C, Tolerance=30ppm, Automotive=No, Category=Crys, ComponentLink2Description=Datasheet, ComponentLink2URL=https://abracon.com/Resonators/abls.pdf, Device Class L1="Passive Components", Device Class L2="Crystals / Oscillators", Device Class L3=Crystals, Digikey Description="CRYSTAL 16.0000MHZ 18PF SMD", Esr=40Ω, Frequency=16MHz, Height=4.3mm, Lead Free=Yes, Mouser Description="Crystal 16MHz ±30ppm (Tol) ±50ppm (Stability) 18pF FUND 40Ohm 2-Pin HC-49/US SMD T/R", Octopart=https://octopart.com/abls-16.000mhz-k4t-abracon-18618626, RoHS=TRUE, Series=ABLS, Stability=50ppm, Standoff Height=0mm

## Via types
v1: diameter 25, hole 10, Top Layer to Bottom Layer, 12 vias
v2: diameter 19.68, hole 7.87, Top Layer to Bottom Layer, 9 vias

## Nets (pads, with @x,y where several pads share a name; then routed paths per layer and width w, separated by ;. In a path a pad name is that pad's centre, name@x,y a point inside that pad or via, vN(x,y) a via of type N, cw(c..) or ccw(c..) an arc to the next point about the centre after c; other vN are vias at no path point)
+3V3: C2.1 C3.1 C4.1 C5.1 C6.1 C7.1 C8.1 C12.2 CB3.2 CB4.2 P3.1 P4.1 PS1.4 R2.2 R3.1 R6.2 R10.1 U1.13 U1.19 U1.32 U1.64 U3.15 U3.28 | length 5923.3
  Top Layer w10: P4.1 2994.74,4155.26 3273.77,4155.26 v1(3276.64,4152.39) ; PS1.4 4031.89,4225 v1(4300,4225) ; v1(4175.79,3820.57) 4150,3846.36 4150,4093.63 4197.68,4141.31 4213.75,4141.31 v1(4215.16,4142.72)
  Bottom Layer w10: R10.1 3067.13,4116.34 3035.37,4148.09 3035.37,4155.96 3016.34,4175 P4.1 ; C7.1 C2.1 ; P3.1 3216.3,4625 3194.43,4603.13 3194.43,4599.15 3158.86,4563.58 C8.1 3142.32,4555.91 R2.2 3061.92,4475 C12.2 2975,4455.32 P4.1 ; v1(3276.64,4152.39) 3546.93,4152.39 U1.64@3546.93,4207.58 ; U1.19 3507.9,3775.64 3507.9,3736.66 3544.57,3700 3595.68,3700 3619.87,3675.81 3619.87,3655.13 3650,3625 4101.59,3625 4227.62,3751.02 CB4.2 4227.62,3768.74 v1(4175.79,3820.57) U3.15 ; U1.64 U1.64@3546.93,4207.58 ; R3.1 3881.89,4375 PS1.4 3799.41,4200 C5.1 3554.5,4200 U1.64@3546.93,4207.58 ; R6.2 3840.63,3971.45 3885.85,3926.23 3885.85,3845.61 3858.15,3817.91 C6.1 C4.1 3740.43,3817.91 3693.07,3865.28 3693.07,3881.93 3659.6,3915.4 3627.98,3915.4 U1.13 3340.75,3915.75 3251.65,3826.65 U1.32 3251.65,3729.49 3249.03,3726.87 3249.03,3702.91 3239.86,3693.74 3239.86,3702.09 3230.18,3711.77 3221.83,3711.77 3091.81,3841.79 3086.78,3841.79 3083.85,3844.71 3080.92,3847.64 3080.92,3945.4 3080.92,3960.52 3016.45,4025 2950,4025 2934.5,4040.5 2934.5,4134.5 P4.1 ; U3.28 v1(4215.16,4142.72) 4338.58,4266.14 CB3.2
FAN_CTRL: R8.2 U1.26 | length 166.5
  Bottom Layer w10: U1.26 3370.11,3775.64 3370.11,3730.86 3375.97,3725 3433.47,3725 3467.13,3691.34 R8.2
GND: B1.2 B1.5 C2.2 C3.2 C4.2 C5.2 C6.2 C7.2 C8.2 C9.2 C10.2 C11.1 C12.1 CB1.1 CB2.1 CB3.1 CB4.1 CX3.1 CX4.1 J3.1 L2.1 P3.3 P3.5 P4.3 PS1.3 Q1.2 R4.1 R5.2 U1.12 U1.18 U1.31 U1.47 U1.63 U3.1 U3.2 U3.3 U3.6 U3.7 U3.9 U3.10 U3.12 U3.16 U3.18 U3.21 U3.27 U3.30 U3.31 U3.32 U3.33 | length 295.6
  Bottom Layer w10: U3.18 4175.79,3925.79 4156.1,3906.1 U3.16 ; U3.21 4171.85,3984.84 v2(4181.69,3975) ; v2(4181.69,4018.31) 4195.47,4032.09 U3.27 ; v2(4225,3931.69) 4234.84,3921.85 U3.12
  other v2: 4181.69,3931.69 4268.31,3931.69 4225,3975 4268.31,3975 4225,4018.31 4268.31,4018.31
HUM: P4.2 R10.2 U1.38 | length 255.8
  Bottom Layer w10: P4.2 3025.79,4075 3067.13,4033.66 R10.2 3082.87,4033.66 3117.39,3999.15 3117.39,3981.69 3143.61,3955.46 3170.6,3955.46 U1.38
IRQ: U1.8 U3.24 | length 727
  Top Layer w10: v1(3549.07,4055.58) 3880.58,4055.58 v1(3925,4100)
  Bottom Layer w10: v1(3549.07,4055.58) 3551.94,4052.71 3551.94,4028.67 3566.44,4014.17 U1.8 ; v1(3925,4100) 4068.5,4100 U3.24
MISO: U1.11 U3.20 | length 572.5
  Bottom Layer w13.12: U1.11 3723.93,3955.12 3735.86,3943.18 3780.04,3943.18 3799.29,3962.43 3799.29,3996.23 3818.54,4015.48 3941.65,4015.48 3991.97,3965.16 U3.20
MOSI: U1.10 U3.22 | length 673.9
  Top Layer w13.12: v1(3550,3950) 4023.3,3950 v1(4068.65,3995.34)
  Bottom Layer w13.12: v1(3550,3950) 3574.8,3974.8 U1.10 ; v1(4068.65,3995.34) 4071.86,3995.34 4081.05,4004.53 U3.22@4113.45,4004.53
NetC9_1: C9.1 R6.1 R7.1 U1.7 | length 1072.8
  Bottom Layer w10: R7.1 3612.72,4487.28 3862.72,4487.28 4000,4350 4000,4300 3815.89,4115.89 3813.28,4115.89 3808.01,4110.62 3808.01,4108.01 3790.72,4090.72 3774.26,4090.72 C9.1 3762.87,4070.47 3749.17,4056.77 3740.32,4056.77 3717.4,4033.86 ; U1.7 3717.4,4033.86 ; R6.1 3757.95,3987.2 3717.4,4027.75 3717.4,4033.86
NetC11_2: C11.2 R11.1 | length 63.6
  Bottom Layer w10: C11.2 R11.1
NetCB1_2: CB1.2 U3.13 U3.14 | length 172.2
  Bottom Layer w10: U3.14 U3.13 4215.16,3838.66 4244.52,3809.3 4253.38,3809.3 4293.94,3768.74 CB1.2
NetCB2_2: CB2.2 U3.29 | length 170.4
  Bottom Layer w10: U3.29 4234.92,4075.47 4234.92,4109.92 4277.44,4152.44 4324.88,4152.44 4338.58,4166.14 CB2.2
NetD1_1: D1.1 J2.1 | length 300.2
  Top Layer w40: D1.1 2963.18,3286.82 J2.1
NetD1_3: D1.3 Q1.4 | length 634.2
  Bottom Layer w40: D1.3 2958.03,3694.41 2930.71,3694.41 2900,3663.7 2900,3425 3034.42,3290.58 3159.77,3290.58 Q1.4
NetJ3_2: J3.2 R3.2 U1.62 | length 658.7
  Bottom Layer w10: U1.62 3507.9,4233.02 3507.9,4277.61 3605.29,4375 3625,4375 ; R3.2 3625,4375 ; J3.2 3666.56,4543.51 3555.86,4543.51 3550,4537.66 3550,4450 3625,4375
NetQ1_1: Q1.1 R8.1 | length 141.1
  Bottom Layer w10: R8.1 3482.88,3608.66 3515.94,3575.6 Q1.1
NetQ1_6: Q1.6 R9.2 | length 119.3
  Bottom Layer w15: R9.2 3057.87,3508.66 3077.4,3489.14 Q1.6
NetR5_1: R5.1 U1.60 | length 127.1
  Bottom Layer w10: R5.1 3419.18,4314.48 3435.52,4314.48 3450,4300 3450.91,4300 3468.19,4282.72 U1.60
NetR11_2: R11.2 U3.17 | length 87.5
  Bottom Layer w10: R11.2 4026.48,3906.2 U3.17@4111.87,3906.2
RESET_PIN: P3.10 R7.2 | length 153.2
  Bottom Layer w15: P3.10 3456.06,4575 3463.74,4582.68 R7.2
RF_ANT: B1.1 C10.1 C13.1 | length 253.4
  Bottom Layer w13.12: C10.1 4578.79,3924.84 4625.59,3971.64 B1.1 4731.1,4014.57 4745.14,4000.53 4745.93,4000.53 4751.97,3994.49 C13.1
RF_ANT_C: C13.2 L1.1 L2.2 | length 124.7
  Bottom Layer w13.12: L2.2 4695.68,3924.35 4697.19,3925.86 4699.65,3925.86 4700.31,3926.53 4751.97,3926.53 ; L1.1 4751.97,3926.53 ; C13.2 4751.97,3926.53
RF_ANT_L: E1.1 L1.2 | length 77.1
  Bottom Layer w13.12: E1.1 L1.2
RF_C_N: B1.3 CX2.1 | length 187.2
  Bottom Layer w6.22: CX2.1 4492.72,3952.34 4492.72,3977.49 4496.36,3981.14 4506.16,3981.14 4516.38,3991.36 4516.38,3996.32 4564.46,4044.39 4570.76,4044.39 4574.41,4040.74 B1.3
RF_C_P: B1.4 CX1.1 | length 187.2
  Bottom Layer w6.22: CX1.1 4492.72,4021.16 4492.72,3996.01 4496.36,3992.36 4501.52,3992.36 4505.16,3996.01 4505.16,4000.97 4559.81,4055.61 4570.76,4055.61 4574.41,4059.26 B1.4
RF_N: CX2.2 U3.5 | length 118.6
  Bottom Layer w6.22: U3.5 4339.17,3965.16 4343.4,3969.39 4357.09,3969.39 4368.84,3981.14 4385.06,3981.14 4388.7,3977.49 4388.7,3952.34 CX2.2
RF_P: CX1.2 U3.4 | length 118.6
  Bottom Layer w6.22: U3.4 4339.17,3984.84 4343.4,3980.61 4352.44,3980.61 4364.19,3992.36 4385.06,3992.36 4388.7,3996.01 4388.7,4021.16 CX1.2
RST: U1.9 U3.8 | length 1329.9
  Top Layer w10: v1(3500,4025) 3501.34,4025 3513.36,4012.99 3887.99,4012.99 3925,4050 4075,4050 4125,4000 4125,3780.86 4130.86,3775 4275,3775 v1(4325,3825)
  Bottom Layer w10: v1(3500,4025) 3530.51,3994.49 U1.9 ; v1(4325,3825) 4325.2,3825.2 4325.2,3906.02 4325.28,3906.1 U3.8
SCK: U1.29 U3.19 | length 1037.3
  Bottom Layer w13.12: U1.29 3311.36,3776.64 3311.36,3805.82 3355.54,3850 3555.75,3850 3655.75,3750 3900,3750 3938.13,3788.13 3938.13,3879.05 4004.56,3945.47 U3.19
SEL: U1.33 U3.23 | length 1035.6
  Top Layer w13.12: v1(3500,3975) 3977.63,3975 3986.91,3984.27 3986.91,3999.39 4000.43,4012.91 v1(4000.43,4016.12)
  Bottom Layer w13.12: U1.33 3171.6,3857.34 3200.78,3857.34 3318.44,3975 v1(3500,3975) ; v1(4000.43,4016.12) 4003.65,4016.12 4013.92,4026.4 4084.72,4026.4 4086.91,4024.21 U3.23
SWD_CLK: P3.4 R4.2 U1.49 | length 376.7
  Bottom Layer w13.12: U1.49 3251.65,4401.46 3317.32,4467.13 R4.2 3317.32,4551.11 3300,4568.43 P3.4
SWD_DIO: P3.2 R2.1 U1.46 | length 512.2
  Bottom Layer w13.12: U1.46 3171.6,4113.25 3200.78,4113.25 3225,4137.47 R2.1 3225,4482.87 3250,4507.87 P3.2
XTAL1: CX3.2 U3.26 XTAL1.2 | length 701.4
  Bottom Layer w10: U3.26 4175.79,4200.79 4335.74,4360.74 4349.88,4360.74 4363.58,4374.44 4363.58,4383.86 4422.83,4443.11 4461.22,4443.11 4543.11,4525 XTAL1.2
XTAL2: CX4.2 U3.25 XTAL1.1 | length 502.9
  Bottom Layer w10: U3.25 4156.1,4260.83 4261.42,4366.14 CX4.2 4261.42,4383.86 4237.99,4407.28 XTAL1.1
~230: C1.2 D1.2 J1.2 PS1.1 R1.2 R9.1 | length 2131.3
  Top Layer w40: D1.2 3098.27,3599.56 PS1.1 3536.26,3180.94 3605.32,3250 4092.27,3250 C1.2 4224.98,3376.92 4295.12,3376.92 R1.2 4449.41,3224.21 4674.21,3224.21 J1.2
  Bottom Layer w20: D1.2 3033.9,3599.56 3042.13,3591.34 R9.1
~N: C1.1 J1.1 J2.2 PS1.2 R1.1 | length 1804.7
  Top Layer w40: J2.2 3577.17,3025 PS1.2 4036.94,3171.26 C1.1 4309.65,2986.12 4344.51,3020.98 4395.79,3020.98 R1.1 4402.16,3025.79 4674.21,3025.79 J1.1
pads on no net: B1.6 E1.2 P3.6 P3.7 P3.8 P3.9 Q1.3 Q1.5 U1.1 U1.2 U1.3 U1.4 U1.5 U1.6 U1.14 U1.15 U1.16 U1.17 U1.20 U1.21 U1.22 U1.23 U1.24 U1.25 U1.27 U1.28 U1.30 U1.34 U1.35 U1.36 U1.37 U1.39 U1.40 U1.41 U1.42 U1.43 U1.44 U1.45 U1.48 U1.50 U1.51 U1.52 U1.53 U1.54 U1.55 U1.56 U1.57 U1.58 U1.59 U1.61 U3.11

## Polygon pours and split planes (outlines as drawn)
GND on Bottom Layer "NONET_L-01_P-001" (solid, remove dead copper, pour order 0): 2854.33,4685.04 2854.33,2913.39 4842.52,2913.39 4842.52,3582.68 4645.67,3582.68 4645.67,3838.58 4842.52,3838.58 4842.52,4685.04 4645.67,4685.04
GND on Top Layer "NONET_L-01_P-001" (solid, pour order 1): 4155,4045 4295,4045 4295,3905 4155,3905